# Altium PCB Street_light_LED_hv2.PcbDoc
Units mm, origin at the board's own origin, x right, y up, seen from the top; angles counter-clockwise.
Board outline 135 x 124 mm, 2 copper layers (Top Layer, Bottom Layer); 144 components, 25 nets, 677 pads, 0 vias.
Unrouted connection lines stored in the file: 2.
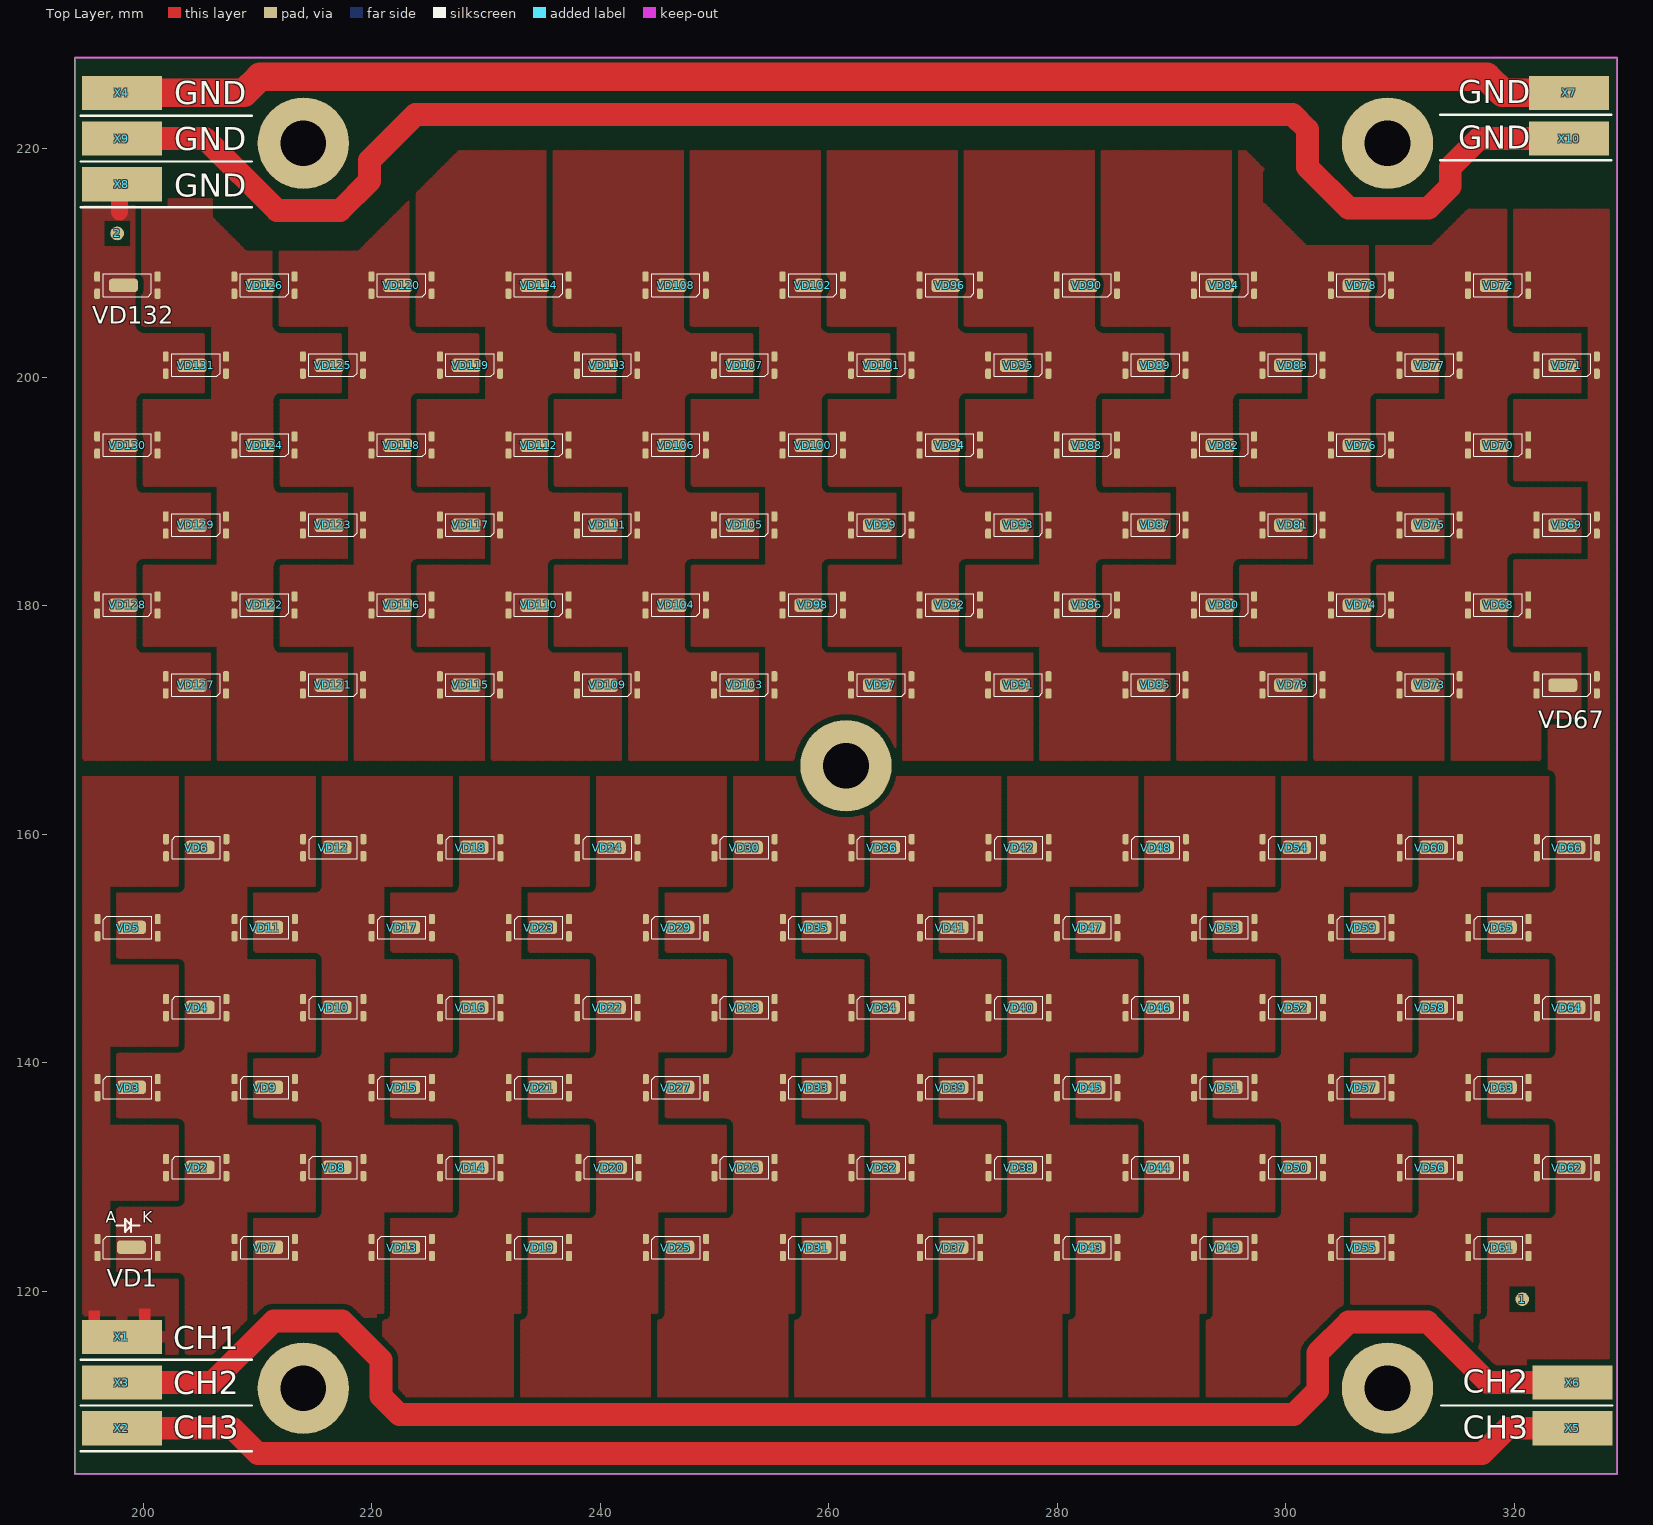
[diagram p0: Top Layer view]
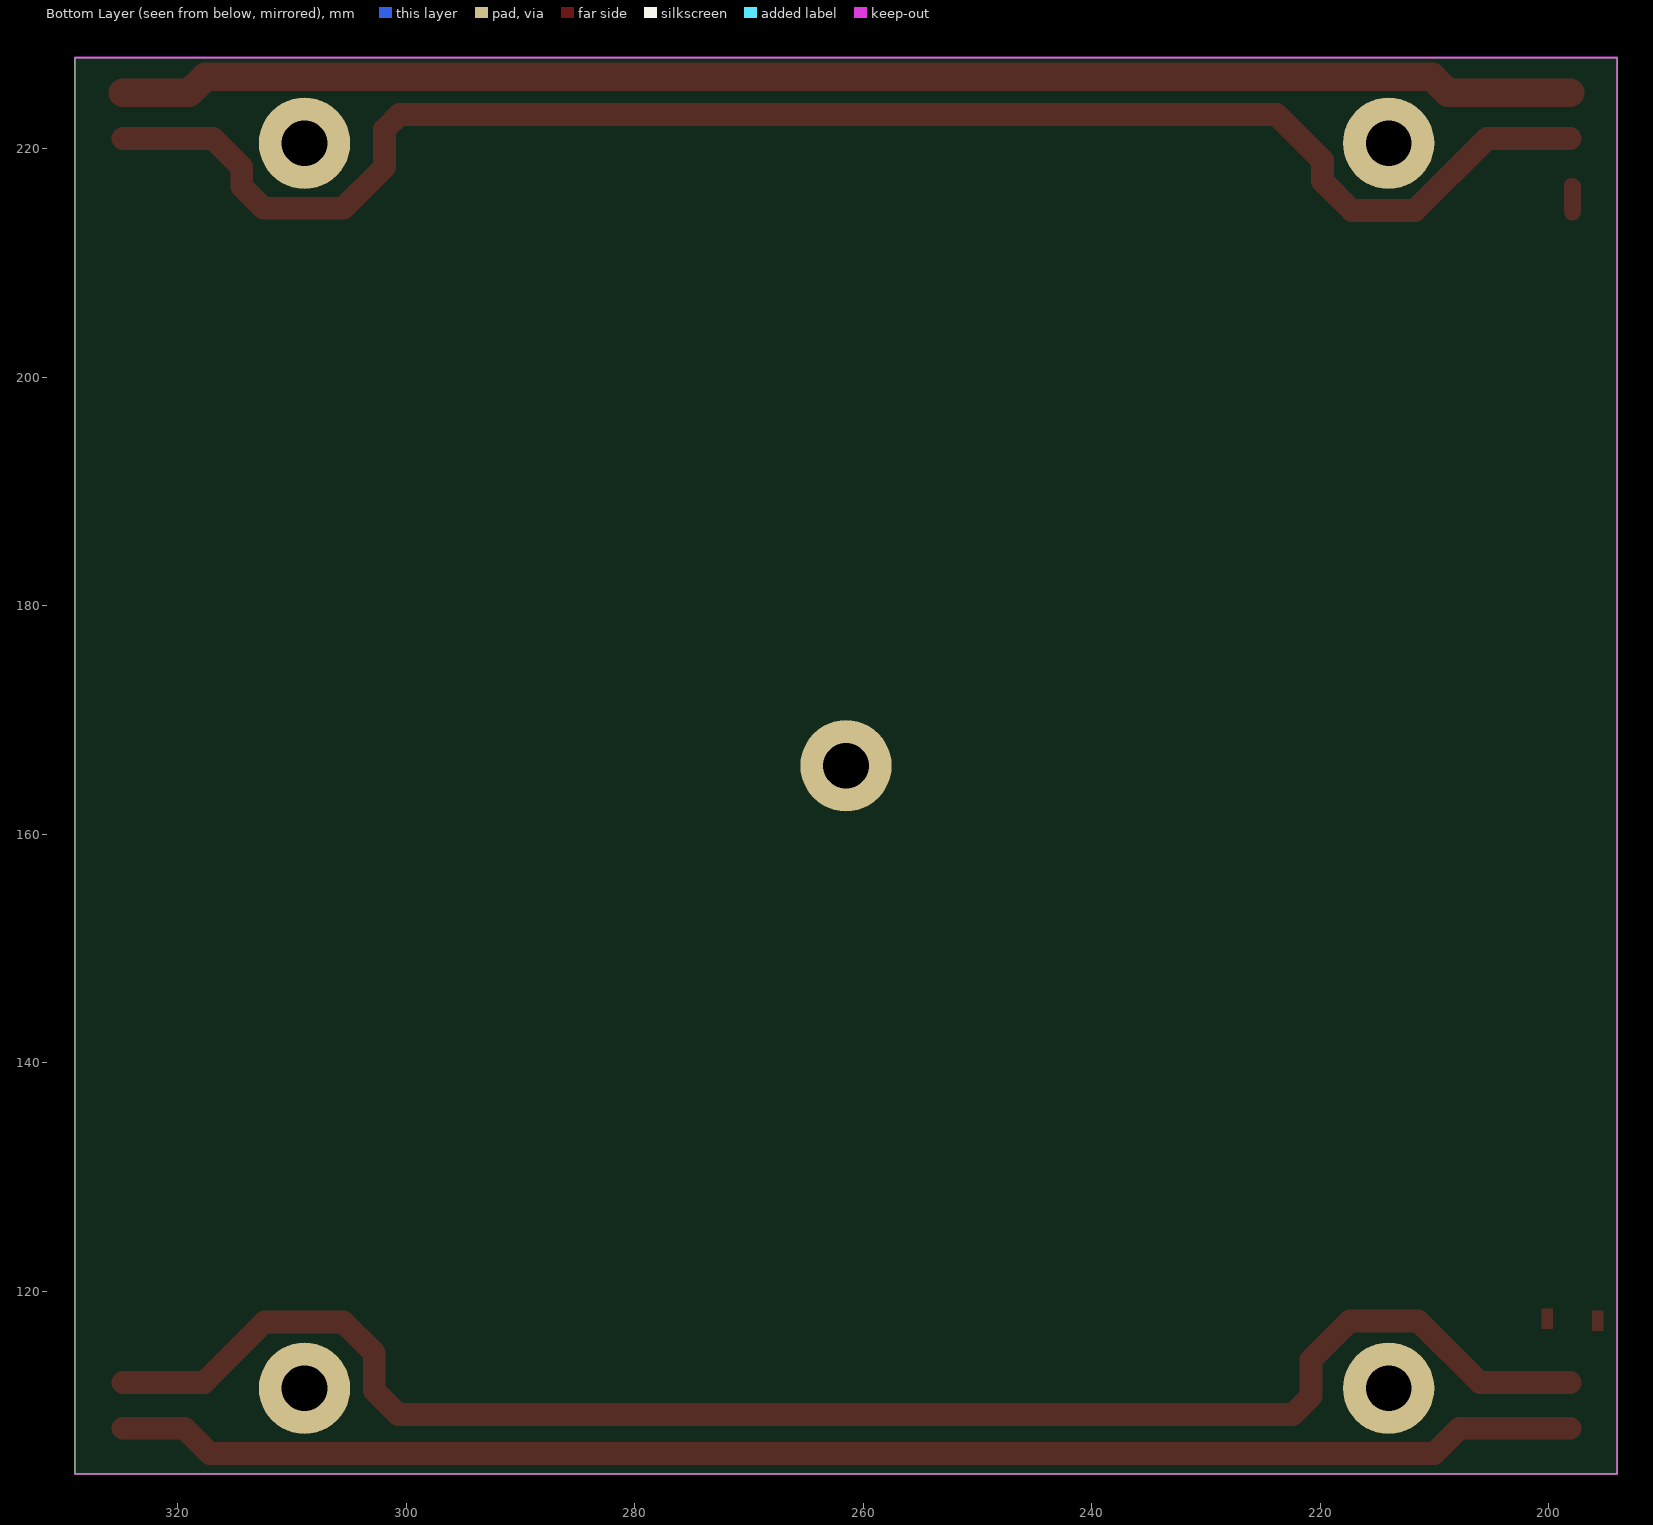
[diagram p1: Bottom Layer view, seen from below]

## Layer stack, top to bottom
Top Solder: solder mask 0.0102, Solder Resist, Dk 3.5
Top Layer: signal copper 0.0356
Dielectric 1: dielectric 0.32, FR-4, Dk 4.8
Bottom Layer: signal copper 0.0356
Bottom Solder: solder mask 0.0102, Solder Resist, Dk 3.5

## Board outline
194,104 329,104 329,228 194,228

## Design rules (kind name [scope] priority, off if disabled: settings)
Clearance Clearance_1 [InPolygon] p1: gap=0.5
Clearance [All] p2: gap=0.2
PolygonConnect PolygonConnect_1 [HasFootprint('LED_Samsung')] p1: connectstyle=Direct reliefconductorwidth=0.254 reliefentries=4 polygonreliefangle="90 Angle" airgapwidth=0.254
PolygonConnect [All] p2: connectstyle=Relief reliefconductorwidth=1 reliefentries=4 polygonreliefangle="90 Angle" airgapwidth=0.3
RoutingVias [All] p1: holewidth=0.711 width=1.27 viastyle="Through Hole" minholewidth=0.711 minwidth=1.27 maxholewidth=0.711 maxwidth=1.27
SolderMaskExpansion [All] p1: expansion=0.102
Width [All] p1: maxlimit=5 minlimit=0.2 preferedwidth=0.5
30 further rules are at their usual default settings.

## Classes and differential pairs
component class LED1: 1 2 VD1 VD2 VD3 VD4 VD5 VD6 VD7 VD8 VD9 VD10 VD11 VD12 VD13 VD14 VD15 VD16 VD17 VD18 VD19 VD20 VD21 VD22 VD23 VD24 VD25 VD26 VD27 VD28 VD29 VD30 VD31 VD32 VD33 VD34 VD35 VD36 X1 X2 X3 X4 X5 X6 X7 X8 X9 X10
component class LED2: VD37 VD38 VD39 VD40 VD41 VD42 VD43 VD44 VD45 VD46 VD47 VD48 VD49 VD50 VD51 VD52 VD53 VD54 VD55 VD56 VD57 VD58 VD59 VD60 VD61 VD62 VD63 VD64 VD65 VD66 VD67 VD68 VD69 VD70 VD71 VD72
component class LED3: VD73 VD74 VD75 VD76 VD77 VD78 VD79 VD80 VD81 VD82 VD83 VD84 VD85 VD86 VD87 VD88 VD89 VD90 VD91 VD92 VD93 VD94 VD95 VD96 VD97 VD98 VD99 VD100 VD101 VD102 VD103 VD104 VD105 VD106 VD107 VD108
component class LED4: VD109 VD110 VD111 VD112 VD113 VD114 VD115 VD116 VD117 VD118 VD119 VD120 VD121 VD122 VD123 VD124 VD125 VD126 VD127 VD128 VD129 VD130 VD131 VD132

## Components (designator, comment, footprint, x,y, rotation, side; value= is the part's Value field where it differs from the comment)
1 "REPER1" REPER1.2 320.699,119.3 r90 top
2 "REPER2" REPER1.2 197.7,212.6 r90 top
VD1 "SPMWHT541MD5WAT0SB" LED_Samsung 198.6,123.8 r0 top
VD2 "SPMWHT541MD5WAT0SB" LED_Samsung 204.6,130.8 r0 top
VD3 "SPMWHT541MD5WAT0SB" LED_Samsung 198.6,137.8 r0 top
VD4 "SPMWHT541MD5WAT0SB" LED_Samsung 204.6,144.8 r0 top
VD5 "SPMWHT541MD5WAT0SB" LED_Samsung 198.6,151.8 r0 top
VD6 "SPMWHT541MD5WAT0SB" LED_Samsung 204.6,158.8 r0 top
VD7 "SPMWHT541MD5WAT0SB" LED_Samsung 210.6,123.8 r0 top
VD8 "SPMWHT541MD5WAT0SB" LED_Samsung 216.6,130.8 r0 top
VD9 "SPMWHT541MD5WAT0SB" LED_Samsung 210.6,137.8 r0 top
VD10 "SPMWHT541MD5WAT0SB" LED_Samsung 216.6,144.8 r0 top
VD11 "SPMWHT541MD5WAT0SB" LED_Samsung 210.6,151.8 r0 top
VD12 "SPMWHT541MD5WAT0SB" LED_Samsung 216.6,158.8 r0 top
VD13 "SPMWHT541MD5WAT0SB" LED_Samsung 222.6,123.8 r0 top
VD14 "SPMWHT541MD5WAT0SB" LED_Samsung 228.6,130.8 r0 top
VD15 "SPMWHT541MD5WAT0SB" LED_Samsung 222.6,137.8 r0 top
VD16 "SPMWHT541MD5WAT0SB" LED_Samsung 228.6,144.8 r0 top
VD17 "SPMWHT541MD5WAT0SB" LED_Samsung 222.6,151.8 r0 top
VD18 "SPMWHT541MD5WAT0SB" LED_Samsung 228.6,158.8 r0 top
VD19 "SPMWHT541MD5WAT0SB" LED_Samsung 234.6,123.8 r0 top
VD20 "SPMWHT541MD5WAT0SB" LED_Samsung 240.7,130.8 r0 top
VD21 "SPMWHT541MD5WAT0SB" LED_Samsung 234.6,137.8 r0 top
VD22 "SPMWHT541MD5WAT0SB" LED_Samsung 240.6,144.8 r0 top
VD23 "SPMWHT541MD5WAT0SB" LED_Samsung 234.6,151.8 r0 top
VD24 "SPMWHT541MD5WAT0SB" LED_Samsung 240.6,158.8 r0 top
VD25 "SPMWHT541MD5WAT0SB" LED_Samsung 246.6,123.8 r0 top
VD26 "SPMWHT541MD5WAT0SB" LED_Samsung 252.6,130.8 r0 top
VD27 "SPMWHT541MD5WAT0SB" LED_Samsung 246.6,137.8 r0 top
VD28 "SPMWHT541MD5WAT0SB" LED_Samsung 252.6,144.8 r0 top
VD29 "SPMWHT541MD5WAT0SB" LED_Samsung 246.6,151.8 r0 top
VD30 "SPMWHT541MD5WAT0SB" LED_Samsung 252.6,158.8 r0 top
VD31 "SPMWHT541MD5WAT0SB" LED_Samsung 258.6,123.8 r0 top
VD32 "SPMWHT541MD5WAT0SB" LED_Samsung 264.6,130.8 r0 top
VD33 "SPMWHT541MD5WAT0SB" LED_Samsung 258.6,137.8 r0 top
VD34 "SPMWHT541MD5WAT0SB" LED_Samsung 264.6,144.8 r0 top
VD35 "SPMWHT541MD5WAT0SB" LED_Samsung 258.6,151.8 r0 top
VD36 "SPMWHT541MD5WAT0SB" LED_Samsung 264.6,158.8 r0 top
VD37 "SPMWHT541MD5WAT0SB" LED_Samsung 270.6,123.8 r0 top
VD38 "SPMWHT541MD5WAT0SB" LED_Samsung 276.6,130.8 r0 top
VD39 "SPMWHT541MD5WAT0SB" LED_Samsung 270.6,137.8 r0 top
VD40 "SPMWHT541MD5WAT0SB" LED_Samsung 276.6,144.8 r0 top
VD41 "SPMWHT541MD5WAT0SB" LED_Samsung 270.6,151.8 r0 top
VD42 "SPMWHT541MD5WAT0SB" LED_Samsung 276.6,158.8 r0 top
VD43 "SPMWHT541MD5WAT0SB" LED_Samsung 282.6,123.8 r0 top
VD44 "SPMWHT541MD5WAT0SB" LED_Samsung 288.6,130.8 r0 top
VD45 "SPMWHT541MD5WAT0SB" LED_Samsung 282.6,137.8 r0 top
VD46 "SPMWHT541MD5WAT0SB" LED_Samsung 288.6,144.8 r0 top
VD47 "SPMWHT541MD5WAT0SB" LED_Samsung 282.6,151.8 r0 top
VD48 "SPMWHT541MD5WAT0SB" LED_Samsung 288.6,158.8 r0 top
VD49 "SPMWHT541MD5WAT0SB" LED_Samsung 294.6,123.8 r0 top
VD50 "SPMWHT541MD5WAT0SB" LED_Samsung 300.6,130.8 r0 top
VD51 "SPMWHT541MD5WAT0SB" LED_Samsung 294.6,137.8 r0 top
VD52 "SPMWHT541MD5WAT0SB" LED_Samsung 300.6,144.8 r0 top
VD53 "SPMWHT541MD5WAT0SB" LED_Samsung 294.6,151.8 r0 top
VD54 "SPMWHT541MD5WAT0SB" LED_Samsung 300.6,158.8 r0 top
VD55 "SPMWHT541MD5WAT0SB" LED_Samsung 306.6,123.8 r0 top
VD56 "SPMWHT541MD5WAT0SB" LED_Samsung 312.6,130.8 r0 top
VD57 "SPMWHT541MD5WAT0SB" LED_Samsung 306.6,137.8 r0 top
VD58 "SPMWHT541MD5WAT0SB" LED_Samsung 312.6,144.8 r0 top
VD59 "SPMWHT541MD5WAT0SB" LED_Samsung 306.6,151.8 r0 top
VD60 "SPMWHT541MD5WAT0SB" LED_Samsung 312.6,158.8 r0 top
VD61 "SPMWHT541MD5WAT0SB" LED_Samsung 318.6,123.8 r0 top
VD62 "SPMWHT541MD5WAT0SB" LED_Samsung 324.6,130.8 r0 top
VD63 "SPMWHT541MD5WAT0SB" LED_Samsung 318.6,137.8 r0 top
VD64 "SPMWHT541MD5WAT0SB" LED_Samsung 324.6,144.8 r0 top
VD65 "SPMWHT541MD5WAT0SB" LED_Samsung 318.6,151.8 r0 top
VD66 "SPMWHT541MD5WAT0SB" LED_Samsung 324.6,158.8 r0 top
VD67 "SPMWHT541MD5WAT0SB" LED_Samsung 324.6,173.1 r180 top
VD68 "SPMWHT541MD5WAT0SB" LED_Samsung 318.6,180.1 r180 top
VD69 "SPMWHT541MD5WAT0SB" LED_Samsung 324.6,187.1 r180 top
VD70 "SPMWHT541MD5WAT0SB" LED_Samsung 318.6,194.1 r180 top
VD71 "SPMWHT541MD5WAT0SB" LED_Samsung 324.6,201.1 r180 top
VD72 "SPMWHT541MD5WAT0SB" LED_Samsung 318.6,208.1 r180 top
VD73 "SPMWHT541MD5WAT0SB" LED_Samsung 312.6,173.1 r180 top
VD74 "SPMWHT541MD5WAT0SB" LED_Samsung 306.6,180.1 r180 top
VD75 "SPMWHT541MD5WAT0SB" LED_Samsung 312.6,187.1 r180 top
VD76 "SPMWHT541MD5WAT0SB" LED_Samsung 306.6,194.1 r180 top
VD77 "SPMWHT541MD5WAT0SB" LED_Samsung 312.6,201.1 r180 top
VD78 "SPMWHT541MD5WAT0SB" LED_Samsung 306.6,208.1 r180 top
VD79 "SPMWHT541MD5WAT0SB" LED_Samsung 300.6,173.1 r180 top
VD80 "SPMWHT541MD5WAT0SB" LED_Samsung 294.6,180.1 r180 top
VD81 "SPMWHT541MD5WAT0SB" LED_Samsung 300.6,187.1 r180 top
VD82 "SPMWHT541MD5WAT0SB" LED_Samsung 294.6,194.1 r180 top
VD83 "SPMWHT541MD5WAT0SB" LED_Samsung 300.6,201.1 r180 top
VD84 "SPMWHT541MD5WAT0SB" LED_Samsung 294.6,208.1 r180 top
VD85 "SPMWHT541MD5WAT0SB" LED_Samsung 288.6,173.1 r180 top
VD86 "SPMWHT541MD5WAT0SB" LED_Samsung 282.6,180.1 r180 top
VD87 "SPMWHT541MD5WAT0SB" LED_Samsung 288.6,187.1 r180 top
VD88 "SPMWHT541MD5WAT0SB" LED_Samsung 282.6,194.1 r180 top
VD89 "SPMWHT541MD5WAT0SB" LED_Samsung 288.6,201.1 r180 top
VD90 "SPMWHT541MD5WAT0SB" LED_Samsung 282.6,208.1 r180 top
VD91 "SPMWHT541MD5WAT0SB" LED_Samsung 276.6,173.1 r180 top
VD92 "SPMWHT541MD5WAT0SB" LED_Samsung 270.6,180.1 r180 top
VD93 "SPMWHT541MD5WAT0SB" LED_Samsung 276.6,187.1 r180 top
VD94 "SPMWHT541MD5WAT0SB" LED_Samsung 270.6,194.1 r180 top
VD95 "SPMWHT541MD5WAT0SB" LED_Samsung 276.6,201.1 r180 top
VD96 "SPMWHT541MD5WAT0SB" LED_Samsung 270.6,208.1 r180 top
VD97 "SPMWHT541MD5WAT0SB" LED_Samsung 264.6,173.1 r180 top
VD98 "SPMWHT541MD5WAT0SB" LED_Samsung 258.6,180.1 r180 top
VD99 "SPMWHT541MD5WAT0SB" LED_Samsung 264.6,187.1 r180 top
VD100 "SPMWHT541MD5WAT0SB" LED_Samsung 258.6,194.1 r180 top
VD101 "SPMWHT541MD5WAT0SB" LED_Samsung 264.6,201.1 r180 top
VD102 "SPMWHT541MD5WAT0SB" LED_Samsung 258.6,208.1 r180 top
VD103 "SPMWHT541MD5WAT0SB" LED_Samsung 252.6,173.1 r180 top
VD104 "SPMWHT541MD5WAT0SB" LED_Samsung 246.6,180.1 r180 top
VD105 "SPMWHT541MD5WAT0SB" LED_Samsung 252.6,187.1 r180 top
VD106 "SPMWHT541MD5WAT0SB" LED_Samsung 246.6,194.1 r180 top
VD107 "SPMWHT541MD5WAT0SB" LED_Samsung 252.6,201.1 r180 top
VD108 "SPMWHT541MD5WAT0SB" LED_Samsung 246.6,208.1 r180 top
VD109 "SPMWHT541MD5WAT0SB" LED_Samsung 240.6,173.1 r180 top
VD110 "SPMWHT541MD5WAT0SB" LED_Samsung 234.6,180.1 r180 top
VD111 "SPMWHT541MD5WAT0SB" LED_Samsung 240.6,187.1 r180 top
VD112 "SPMWHT541MD5WAT0SB" LED_Samsung 234.6,194.1 r180 top
VD113 "SPMWHT541MD5WAT0SB" LED_Samsung 240.6,201.1 r180 top
VD114 "SPMWHT541MD5WAT0SB" LED_Samsung 234.6,208.1 r180 top
VD115 "SPMWHT541MD5WAT0SB" LED_Samsung 228.6,173.1 r180 top
VD116 "SPMWHT541MD5WAT0SB" LED_Samsung 222.6,180.1 r180 top
VD117 "SPMWHT541MD5WAT0SB" LED_Samsung 228.6,187.1 r180 top
VD118 "SPMWHT541MD5WAT0SB" LED_Samsung 222.6,194.1 r180 top
VD119 "SPMWHT541MD5WAT0SB" LED_Samsung 228.6,201.1 r180 top
VD120 "SPMWHT541MD5WAT0SB" LED_Samsung 222.6,208.1 r180 top
VD121 "SPMWHT541MD5WAT0SB" LED_Samsung 216.6,173.1 r180 top
VD122 "SPMWHT541MD5WAT0SB" LED_Samsung 210.6,180.1 r180 top
VD123 "SPMWHT541MD5WAT0SB" LED_Samsung 216.6,187.1 r180 top
VD124 "SPMWHT541MD5WAT0SB" LED_Samsung 210.6,194.1 r180 top
VD125 "SPMWHT541MD5WAT0SB" LED_Samsung 216.6,201.1 r180 top
VD126 "SPMWHT541MD5WAT0SB" LED_Samsung 210.6,208.1 r180 top
VD127 "SPMWHT541MD5WAT0SB" LED_Samsung 204.6,173.1 r180 top
VD128 "SPMWHT541MD5WAT0SB" LED_Samsung 198.6,180.1 r180 top
VD129 "SPMWHT541MD5WAT0SB" LED_Samsung 204.6,187.1 r180 top
VD130 "SPMWHT541MD5WAT0SB" LED_Samsung 198.6,194.1 r180 top
VD131 "SPMWHT541MD5WAT0SB" LED_Samsung 204.6,201.1 r180 top
VD132 "SPMWHT541MD5WAT0SB" LED_Samsung 198.6,208.1 r180 top
X1 "PIN_7x3mm_SMD" PIN_7x3mm_SMD 198.1,116 r0 top
X2 "PIN_7x3mm_SMD" PIN_7x3mm_SMD 198.1,108 r0 top
X3 "PIN_7x3mm_SMD" PIN_7x3mm_SMD 198.1,112 r0 top
X4 "PIN_7x3mm_SMD" PIN_7x3mm_SMD 198.1,224.9 r0 top
X5 "PIN_7x3mm_SMD" PIN_7x3mm_SMD 325.1,108 r0 top
X6 "PIN_7x3mm_SMD" PIN_7x3mm_SMD 325.1,112 r0 top
X7 "PIN_7x3mm_SMD" PIN_7x3mm_SMD 324.8,224.9 r0 top
X8 "PIN_7x3mm_SMD" PIN_7x3mm_SMD 198.1,216.9 r0 top
X9 "PIN_7x3mm_SMD" PIN_7x3mm_SMD 198.1,220.9 r0 top
X10 "PIN_7x3mm_SMD" PIN_7x3mm_SMD 324.8,220.9 r0 top

## Footprints (in the part's own frame and the unit in brackets; to place one, negate y for a bottom-side part, rotate by r counter-clockwise, add the part's x,y. Pads: shape width x height; smd on the part's side, far side on the other; paste and mask are expansions set on the pad)
LED_Samsung [mm]
  rrect50% 0.52x0.9 smd: 1(-2.625,-0.725) 1(-2.625,0.775) 2(2.65,-0.725) 2(2.65,0.775)
  rrect50% 2.54x1.18 smd: 2(0.35,0.05)
  silkscreen extent -2.1,-0.95 2.12,1.02, body extent -2.1,-0.95 2.12,1.02, height 1.05
PIN_7x3mm_SMD [mm]
  rect 7x3 smd: 1(0,0)
REPER1.2 [mm]
  round 1.2 smd paste-25.4 mask-25.4: 1(0,0)
  Top Layer pour cut-out: -1.2,-1.2 1.2,-1.2 1.2,1.2 -1.2,1.2

## Part data
1 2: library part REPER1.2, "REPER1.2"
VD1 VD2 VD3 VD4 VD5 VD6 VD7 VD8 VD9 VD10 VD11 VD12 VD13 VD14 VD15 VD16 VD17 VD18 VD19 VD20 VD21 VD22 VD23 VD24 VD25 VD26 VD27 VD28 VD29 VD30 VD31 VD32 VD33 VD34 VD35 VD36 VD37 VD38 VD39 VD40 VD41 VD42 VD43 VD44 VD45 VD46 VD47 VD48 VD49 VD50 VD51 VD52 VD53 VD54 VD55 VD56 VD57 VD58 VD59 VD60 VD61 VD62 VD63 VD64 VD65 VD66 VD67 VD68 VD69 VD70 VD71 VD72 VD73 VD74 VD75 VD76 VD77 VD78 VD79 VD80 VD81 VD82 VD83 VD84 VD85 VD86 VD87 VD88 VD89 VD90 VD91 VD92 VD93 VD94 VD95 VD96 VD97 VD98 VD99 VD100 VD101 VD102 VD103 VD104 VD105 VD106 VD107 VD108 VD109 VD110 VD111 VD112 VD113 VD114 VD115 VD116 VD117 VD118 VD119 VD120 VD121 VD122 VD123 VD124 VD125 VD126 VD127 VD128 VD129 VD130 VD131 VD132: library part "LED SPMWHT541MD5WAT0SB"

## Free pads (board coordinates)
  round 8 hole 4 unplated: 0(214,111.5) 0(214,220.5) 0(261.5,166) 0(308.9,111.5) 0(308.9,220.5)

## Nets (pads, with @x,y where several pads share a name; then routed paths per layer and width w, separated by ;. In a path a pad name is that pad's centre, name@x,y a point inside that pad or via, vN(x,y) a via of type N, cw(c..) or ccw(c..) an arc to the next point about the centre after c; other vN are vias at no path point)
GND: VD127.2 VD128.2 VD129.2 VD130.2 VD131.2 VD132.2 X4.1 X7.1 X8.1 X9.1 X10.1 | length 273
  Top Layer w1: X8.1@197.9,216.7 X8.1
  Top Layer w1.5: 197.9,214.5 X8.1@197.9,216.7
  Top Layer w2: X9.1 205.4,220.9 211.7,214.6 217.2,214.6 219.8,217.2 219.8,219 223.8,223 300.6,223 301.9,221.7 301.9,218.4 305.5,214.8 312.5,214.8 314.4,216.7 314.4,218.4 316.9,220.9 X10.1
  Top Layer w2.5: X4.1 208.8,224.9 210.2,226.3 317.6,226.3 319,224.9 X7.1
NetVD1_1: VD1.1 VD2.1 VD3.1 VD4.1 VD5.1 VD6.1 X1.1
NetVD1_2: VD1.2 VD2.2 VD3.2 VD4.2 VD5.2 VD6.2 VD7.1 VD8.1 VD9.1 VD10.1 VD11.1 VD12.1
NetVD7_2: VD7.2 VD8.2 VD9.2 VD10.2 VD11.2 VD12.2 VD13.1 VD14.1 VD15.1 VD16.1 VD17.1 VD18.1
NetVD13_2: VD13.2 VD14.2 VD15.2 VD16.2 VD17.2 VD18.2 VD19.1 VD20.1 VD21.1 VD22.1 VD23.1 VD24.1
NetVD19_2: VD19.2 VD20.2 VD21.2 VD22.2 VD23.2 VD24.2 VD25.1 VD26.1 VD27.1 VD28.1 VD29.1 VD30.1
NetVD25_2: VD25.2 VD26.2 VD27.2 VD28.2 VD29.2 VD30.2 VD31.1 VD32.1 VD33.1 VD34.1 VD35.1 VD36.1
NetVD31_2: VD31.2 VD32.2 VD33.2 VD34.2 VD35.2 VD36.2 VD37.1 VD38.1 VD39.1 VD40.1 VD41.1 VD42.1
NetVD37_2: VD37.2 VD38.2 VD39.2 VD40.2 VD41.2 VD42.2 VD43.1 VD44.1 VD45.1 VD46.1 VD47.1 VD48.1
NetVD43_2: VD43.2 VD44.2 VD45.2 VD46.2 VD47.2 VD48.2 VD49.1 VD50.1 VD51.1 VD52.1 VD53.1 VD54.1
NetVD49_2: VD49.2 VD50.2 VD51.2 VD52.2 VD53.2 VD54.2 VD55.1 VD56.1 VD57.1 VD58.1 VD59.1 VD60.1
NetVD55_2: VD55.2 VD56.2 VD57.2 VD58.2 VD59.2 VD60.2 VD61.1 VD62.1 VD63.1 VD64.1 VD65.1 VD66.1
NetVD61_2: VD61.2 VD62.2 VD63.2 VD64.2 VD65.2 VD66.2 VD67.1 VD68.1 VD69.1 VD70.1 VD71.1 VD72.1
NetVD67_2: VD67.2 VD68.2 VD69.2 VD70.2 VD71.2 VD72.2 VD73.1 VD74.1 VD75.1 VD76.1 VD77.1 VD78.1
NetVD73_2: VD73.2 VD74.2 VD75.2 VD76.2 VD77.2 VD78.2 VD79.1 VD80.1 VD81.1 VD82.1 VD83.1 VD84.1
NetVD79_2: VD79.2 VD80.2 VD81.2 VD82.2 VD83.2 VD84.2 VD85.1 VD86.1 VD87.1 VD88.1 VD89.1 VD90.1
NetVD85_2: VD85.2 VD86.2 VD87.2 VD88.2 VD89.2 VD90.2 VD91.1 VD92.1 VD93.1 VD94.1 VD95.1 VD96.1
NetVD91_2: VD91.2 VD92.2 VD93.2 VD94.2 VD95.2 VD96.2 VD97.1 VD98.1 VD99.1 VD100.1 VD101.1 VD102.1
NetVD97_2: VD97.2 VD98.2 VD99.2 VD100.2 VD101.2 VD102.2 VD103.1 VD104.1 VD105.1 VD106.1 VD107.1 VD108.1
NetVD103_2: VD103.2 VD104.2 VD105.2 VD106.2 VD107.2 VD108.2 VD109.1 VD110.1 VD111.1 VD112.1 VD113.1 VD114.1
NetVD109_2: VD109.2 VD110.2 VD111.2 VD112.2 VD113.2 VD114.2 VD115.1 VD116.1 VD117.1 VD118.1 VD119.1 VD120.1
NetVD115_2: VD115.2 VD116.2 VD117.2 VD118.2 VD119.2 VD120.2 VD121.1 VD122.1 VD123.1 VD124.1 VD125.1 VD126.1
NetVD121_2: VD121.2 VD122.2 VD123.2 VD124.2 VD125.2 VD126.2 VD127.1 VD128.1 VD129.1 VD130.1 VD131.1 VD132.1
NetX2_1: X2.1 X5.1 | length 128.5
  Top Layer w2: X2.1 207.8,108 210,105.8 317.2,105.8 319.4,108 X5.1@324.8,108
NetX3_1: X3.1 X6.1 | length 141.7
  Top Layer w2: X3.1 206,112 211.4,117.4 217.4,117.4 220.8,114 220.8,110.8 222.4,109.2 300.7,109.2 302.8,111.3 302.8,114.6 305.5,117.3 312.4,117.3 317.7,112 X6.1@324.8,112
pads on no net: 1.1 2.1

## Polygon pours and split planes (outlines as drawn)
GND on Top Layer "GND_L01_P114" (hatched 90Degree grid 0.15 track 0.2, remove dead copper, pour order 114): 199.9,221.1 199.9,228 194,228 194,166.5 201.1,166.5 206.5,166.5 206.5,176.5 200,176.5 200,183.5 206.5,183.5 206.5,190.5 200,190.5 200,198 206,198 206,204.5 200,204.5 199.9,204.6 199.9,225.1 199.9,228
NetVD121_2 on Top Layer "NETVD121_2_L01_P112" (hatched 90Degree grid 0.15 track 0.2, remove dead copper, pour order 112): 212,228 212,204.5 218.399,204.5 218.5,204.399 218.5,198 212,198 212,191 218.399,191 218.399,184 212,184 212,176.5 218.399,176.5 218.399,169.5 218.5,166.5 215,166.5 206.5,166.5 206.5,176.5 200,176.5 200,183.5 206.5,183.5 206.5,190.5 200,190.5 200,198 206,198 206,204.5 200,204.5 199.9,204.6 199.9,228
NetVD115_2 on Top Layer "NETVD115_2_L01_P110" (hatched 90Degree grid 0.15 track 0.2, remove dead copper, pour order 110): 224,228 224,204.5 230.399,204.5 230.5,204.399 230.5,198 224,198 224,191 230.399,191 230.399,184 224,184 224,176.5 230.399,176.5 230.399,169.5 230.5,166.5 227,166.5 218.5,166.5 218.5,176.5 212,176.5 212,183.5 218.5,183.5 218.5,190.5 212,190.5 212,198 218,198 218,204.5 212,204.5 211.9,204.6 211.9,228
NetVD109_2 on Top Layer "NETVD109_2_L01_P108" (hatched 90Degree grid 0.15 track 0.2, remove dead copper, pour order 108): 236,228 236,204.5 242.399,204.5 242.5,204.399 242.5,198 236,198 236,191 242.399,191 242.399,184 236,184 236,176.5 242.399,176.5 242.399,169.5 242.5,166.5 239,166.5 230.5,166.5 230.5,176.5 224,176.5 224,183.5 230.5,183.5 230.5,190.5 224,190.5 224,198 230,198 230,204.5 224,204.5 223.9,204.6 223.9,228
NetVD103_2 on Top Layer "NETVD103_2_L01_P106" (hatched 90Degree grid 0.15 track 0.2, remove dead copper, pour order 106): 248,228 248,204.5 254.399,204.5 254.5,204.399 254.5,198 248,198 248,191 254.399,191 254.399,184 248,184 248,176.5 254.399,176.5 254.399,169.5 254.5,166.5 251,166.5 242.5,166.5 242.5,176.5 236,176.5 236,183.5 242.5,183.5 242.5,190.5 236,190.5 236,198 242,198 242,204.5 236,204.5 235.9,204.6 235.9,228
NetVD97_2 on Top Layer "NETVD97_2_L01_P104" (hatched 90Degree grid 0.15 track 0.2, remove dead copper, pour order 104): 260,228 260,204.5 266.399,204.5 266.5,204.399 266.5,198 260,198 260,191 266.399,191 266.399,184 260,184 260,176.5 266.399,176.5 266.399,169.5 266.5,166.5 263,166.5 254.5,166.5 254.5,176.5 248,176.5 248,183.5 254.5,183.5 254.5,190.5 248,190.5 248,198 254,198 254,204.5 248,204.5 247.9,204.6 247.9,228
NetVD91_2 on Top Layer "NETVD91_2_L01_P102" (hatched 90Degree grid 0.15 track 0.2, remove dead copper, pour order 102): 272,228 272,204.5 278.399,204.5 278.5,204.399 278.5,198 272,198 272,191 278.399,191 278.399,184 272,184 272,176.5 278.399,176.5 278.399,169.5 278.5,166.5 275,166.5 266.5,166.5 266.5,176.5 260,176.5 260,183.5 266.5,183.5 266.5,190.5 260,190.5 260,198 266,198 266,204.5 260,204.5 259.9,204.6 259.9,228
NetVD85_2 on Top Layer "NETVD85_2_L01_P100" (hatched 90Degree grid 0.15 track 0.2, remove dead copper, pour order 100): 284,228 284,204.5 290.399,204.5 290.5,204.399 290.5,198 284,198 284,191 290.399,191 290.399,184 284,184 284,176.5 290.399,176.5 290.399,169.5 290.5,166.5 287,166.5 278.5,166.5 278.5,176.5 272,176.5 272,183.5 278.5,183.5 278.5,190.5 272,190.5 272,198 278,198 278,204.5 272,204.5 271.9,204.6 271.9,228
NetVD79_2 on Top Layer "NETVD79_2_L01_P098" (hatched 90Degree grid 0.15 track 0.2, remove dead copper, pour order 98): 296,228 296,204.5 302.399,204.5 302.5,204.399 302.5,198 296,198 296,191 302.399,191 302.399,184 296,184 296,176.5 302.399,176.5 302.399,169.5 302.5,166.5 299,166.5 290.5,166.5 290.5,176.5 284,176.5 284,183.5 290.5,183.5 290.5,190.5 284,190.5 284,198 290,198 290,204.5 284,204.5 283.9,204.6 283.9,228
NetVD73_2 on Top Layer "NETVD73_2_L01_P096" (hatched 90Degree grid 0.15 track 0.2, remove dead copper, pour order 96): 308,228 308,204.5 314.399,204.5 314.5,204.399 314.5,198 308,198 308,191 314.399,191 314.399,184 308,184 308,176.5 314.399,176.5 314.399,169.5 314.5,166.5 311,166.5 302.5,166.5 302.5,176.5 296,176.5 296,183.5 302.5,183.5 302.5,190.5 296,190.5 296,198 302,198 302,204.5 296,204.5 295.9,204.6 295.9,228
NetVD67_2 on Top Layer "NETVD67_2_L01_P094" (hatched 90Degree grid 0.15 track 0.2, remove dead copper, pour order 94): 320,228 320,204.5 326.399,204.5 326.5,204.399 326.5,198 320,198 320,191 326.399,191 326.399,184 320,184 320,176.5 326.399,176.5 326.399,169.5 323,169.5 323,166.5 314.5,166.5 314.5,176.5 308,176.5 308,183.5 314.5,183.5 314.5,190.5 308,190.5 308,198 314,198 314,204.5 308,204.5 307.9,204.6 307.9,228
NetVD61_2 on Top Layer "NETVD61_2_L01_P058" (hatched 90Degree grid 0.15 track 0.2, remove dead copper, pour order 58): 323,158.7 323,169.5 326.5,169.5 326.5,176.5 320,176.5 320,184 326.5,184 326.5,191 320,191 320,198 326.5,198 326.5,204.4 326.5,204.5 320,204.5 320,214 320,228 328.9,228 328.9,109.9 316,109.9 316,122.271 316.2,122.471 316.2,158.8
NetVD55_2 on Top Layer "NETVD55_2_L01_P052" (hatched 90Degree grid 0.15 track 0.2, remove dead copper, pour order 52): 311,154.8 305,154.8 305.1,154.7 305.1,148.5 305.1,121 305,117.9 305,109.6 309.3,109.6 316.35,109.6 316.35,118.15 316.35,154.8
NetVD55_2 on Top Layer "NETVD55_2_L01_P050" (hatched 90Degree grid 0.15 track 0.2, remove dead copper, pour order 50): 311,165 323,165 323,155.5 317,155.5 317,150.8 317,149 323,149 323,141 317,141 317,134.5 323,134.5 323,127 317,127 317,118.1 313.8,118.1 311.1,118.1
NetVD49_2 on Top Layer "NETVD49_2_L01_P048" (hatched 90Degree grid 0.15 track 0.2, remove dead copper, pour order 48): 299,154.8 293,154.8 293.1,154.7 293.1,148.5 293.1,121 293,117.9 293,109.6 297.3,109.6 304.35,109.6 304.35,118.15 304.35,154.8
NetVD49_2 on Top Layer "NETVD49_2_L01_P046" (hatched 90Degree grid 0.15 track 0.2, remove dead copper, pour order 46): 299,165 311,165 311,155.5 305,155.5 305,150.8 305,149 311,149 311,141 305,141 305,134.5 311,134.5 311,127 305,127 305,118.1 301.8,118.1 299.1,118.1
NetVD43_2 on Top Layer "NETVD43_2_L01_P040" (hatched 90Degree grid 0.15 track 0.2, remove dead copper, pour order 40): 287,154.8 281,154.8 281.1,154.7 281.1,148.5 281.1,121 281,117.9 281,109.6 285.3,109.6 292.35,109.6 292.35,118.15 292.35,154.8
NetVD43_2 on Top Layer "NETVD43_2_L01_P038" (hatched 90Degree grid 0.15 track 0.2, remove dead copper, pour order 38): 287,165 299,165 299,155.5 293,155.5 293,150.8 293,149 299,149 299,141 293,141 293,134.5 299,134.5 299,127 293,127 293,118.1 289.8,118.1 287.1,118.1
NetVD37_2 on Top Layer "NETVD37_2_L01_P036" (hatched 90Degree grid 0.15 track 0.2, remove dead copper, pour order 36): 275,154.8 269,154.8 269.1,154.7 269.1,148.5 269.1,121 269,117.9 269,109.6 273.3,109.6 280.35,109.6 280.35,118.15 280.35,154.8
NetVD37_2 on Top Layer "NETVD37_2_L01_P034" (hatched 90Degree grid 0.15 track 0.2, remove dead copper, pour order 34): 275,165 287,165 287,155.5 281,155.5 281,150.8 281,149 287,149 287,141 281,141 281,134.5 287,134.5 287,127 281,127 281,118.1 277.8,118.1 275.1,118.1
NetVD31_2 on Top Layer "NETVD31_2_L01_P032" (hatched 90Degree grid 0.15 track 0.2, remove dead copper, pour order 32): 263,154.8 257,154.8 257.1,154.7 257.1,148.5 257.1,121 257,117.9 257,109.6 261.3,109.6 268.35,109.6 268.35,118.15 268.35,154.8
NetVD31_2 on Top Layer "NETVD31_2_L01_P030" (hatched 90Degree grid 0.15 track 0.2, remove dead copper, pour order 30): 263,165 275,165 275,155.5 269,155.5 269,150.8 269,149 275,149 275,141 269,141 269,134.5 275,134.5 275,127 269,127 269,118.1 265.8,118.1 263.1,118.1
NetVD25_2 on Top Layer "NETVD25_2_L01_P028" (hatched 90Degree grid 0.15 track 0.2, remove dead copper, pour order 28): 251,154.8 245,154.8 245.1,154.7 245.1,148.5 245.1,121 245,117.9 245,109.6 249.3,109.6 256.35,109.6 256.35,118.15 256.35,154.8
NetVD25_2 on Top Layer "NETVD25_2_L01_P026" (hatched 90Degree grid 0.15 track 0.2, remove dead copper, pour order 26): 251,165 263,165 263,155.5 257,155.5 257,150.8 257,149 263,149 263,141 257,141 257,134.5 263,134.5 263,127 257,127 257,118.1 253.8,118.1 251.1,118.1
NetVD19_2 on Top Layer "NETVD19_2_L01_P024" (hatched 90Degree grid 0.15 track 0.2, remove dead copper, pour order 24): 239,165 251,165 251,155.5 245,155.5 245,150.8 245,149 251,149 251,141 245,141 245,134.5 251,134.5 251,127 245,127 245,118.1 241.8,118.1 239.1,118.1
NetVD19_2 on Top Layer "NETVD19_2_L01_P022" (hatched 90Degree grid 0.15 track 0.2, remove dead copper, pour order 22): 239,154.8 233,154.8 233.1,154.7 233.1,148.5 233.1,121 233,117.9 233,109.6 237.3,109.6 244.35,109.6 244.35,118.15 244.35,154.8
NetVD13_2 on Top Layer "NETVD13_2_L01_P016" (hatched 90Degree grid 0.15 track 0.2, remove dead copper, pour order 16): 227,154.8 221,154.8 221.1,154.7 221.1,148.5 221.1,121 221,117.9 221,109.6 225.3,109.6 232.35,109.6 232.35,118.15 232.35,154.8
NetVD13_2 on Top Layer "NETVD13_2_L01_P014" (hatched 90Degree grid 0.15 track 0.2, remove dead copper, pour order 14): 227,165 239,165 239,155.5 233,155.5 233,150.8 233,149 239,149 239,141 233,141 233,134.5 239,134.5 239,127 233,127 233,118.1 229.8,118.1 227.1,118.1
NetVD7_2 on Top Layer "NETVD7_2_L01_P012" (hatched 90Degree grid 0.15 track 0.2, remove dead copper, pour order 12): 215,165 227,165 227,155.5 221,155.5 221,150.8 221,149 227,149 227,141 221,141 221,134.5 227,134.5 227,127 221,127 221,118.1 217.8,118.1 215.1,118.1
NetVD7_2 on Top Layer "NETVD7_2_L01_P010" (hatched 90Degree grid 0.15 track 0.2, remove dead copper, pour order 10): 215,154.8 209,154.8 209.1,154.7 209.1,148.5 209.1,121 209,117.9 215,117.75 219.3,117.75 220.35,117.75 220.35,118.15 220.35,154.8
NetVD1_2 on Top Layer "NETVD1_2_L01_P008" (hatched 90Degree grid 0.15 track 0.2, remove dead copper, pour order 8): 203,154.8 197,154.8 197.1,154.7 197.1,148.5 197.1,121 203,121 203,114.5 206,114.5 209,117.5 208.35,118.15 208.35,154.8
NetVD1_2 on Top Layer "NETVD1_2_L01_P006" (hatched 90Degree grid 0.15 track 0.2, remove dead copper, pour order 6): 203,165 215,165 215,155.5 209,155.5 209,150.8 209,149 215,149 215,141 209,141 209,134.5 215,134.5 215,127 209,127 209,117.5 206,114.5 203,114.5
NetVD1_1 on Top Layer "NETVD1_1_L01_P000" (hatched 90Degree grid 0.15 track 0.2, remove dead copper, pour order 0): 194,114.5 196.1,114.5 203,114.5 203,121 197,121 197,126.8 197,128 203,128 203,134.5 197,134.5 197,141.5 203,141.5 203,148.5 197,148.5 197,155.5 203,155.5 203,165 194,165

## Keep-outs
Keep-Out Layer:
  the board outline again, w0.2

## Other copper
Top Layer:
  rectangle net NetVD1_1: 199.6,116.7 200.6,118.5
  rectangle net NetVD1_1: 195.2,116.5 196.2,118.3
  pour cut-out: 194,215.6 206,215.6 206,214 209,211 218.8,211 227.6,219.8 296.5,219.8 298.1,218.2 297.9,218 297.9,215.2 298.1,215.2 301.8,211.5 312.8,211.5 316,214.7 329,214.7 329,228 194,228

## Silkscreen, mask and mechanical layers (free items; w line width, h text height)
Top Overlay:
  lines w0.2: 194.5,106 209.5,106 ; 194.5,110 209.5,110 ; 194.5,114 209.5,114 ; 194.5,214.9 209.5,214.9 ; 194.5,218.9 209.5,218.9 ; 194.5,222.9 209.5,222.9 ; 197.65,125.75 198.4,125.75 ; 198.9,125.2 198.9,125.8 ; 198.9,125.75 199.65,125.75 ; 198.9,126.3 198.9,125.7 ; 313.5,219 328.5,219 ; 313.5,223 328.5,223 ; 313.6,110 328.6,110 ; 198.4,125.2 198.9,125.7 ; 198.4,125.2 198.4,125.2 ; 198.4,125.2 198.4,126.3 198.9,125.8 ; 198.9,125.7 198.9,125.8
  text "GND" at 315.1,224 h2
  text "GND" at 202.7,223.9 h2
  text "GND" at 315.1,220 h2
  text "GND" at 202.7,219.9 h2
  text "GND" at 202.7,215.8 h2
  text "A" at 196.7,126 h1
  text "K" at 199.9,126 h1
  text "CH1" at 202.6,114.9 h2
  text "CH2" at 315.5,111.1 h2
  text "CH2" at 202.6,111 h2
  text "CH3" at 202.6,107.1 h2
  text "CH3" at 315.5,107.1 h2

## Dimensions
194,228 to 329,228 on Mechanical 1
329,228 to 329,104 on Mechanical 1